# EAGLE board PCB (EAGLE 9.7.0), part 1 of 2
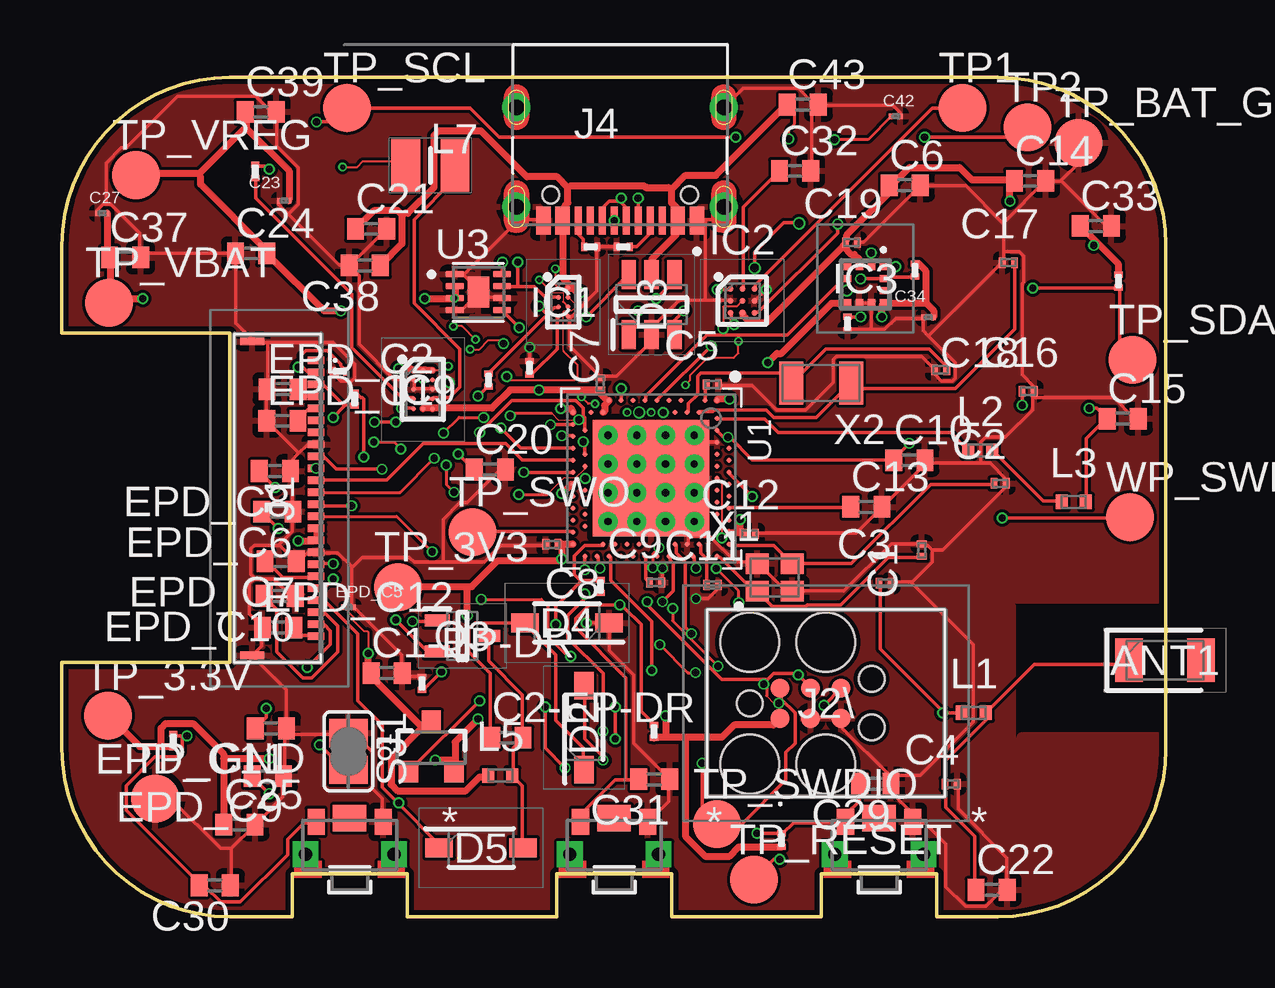
[diagram p0: board, top side]
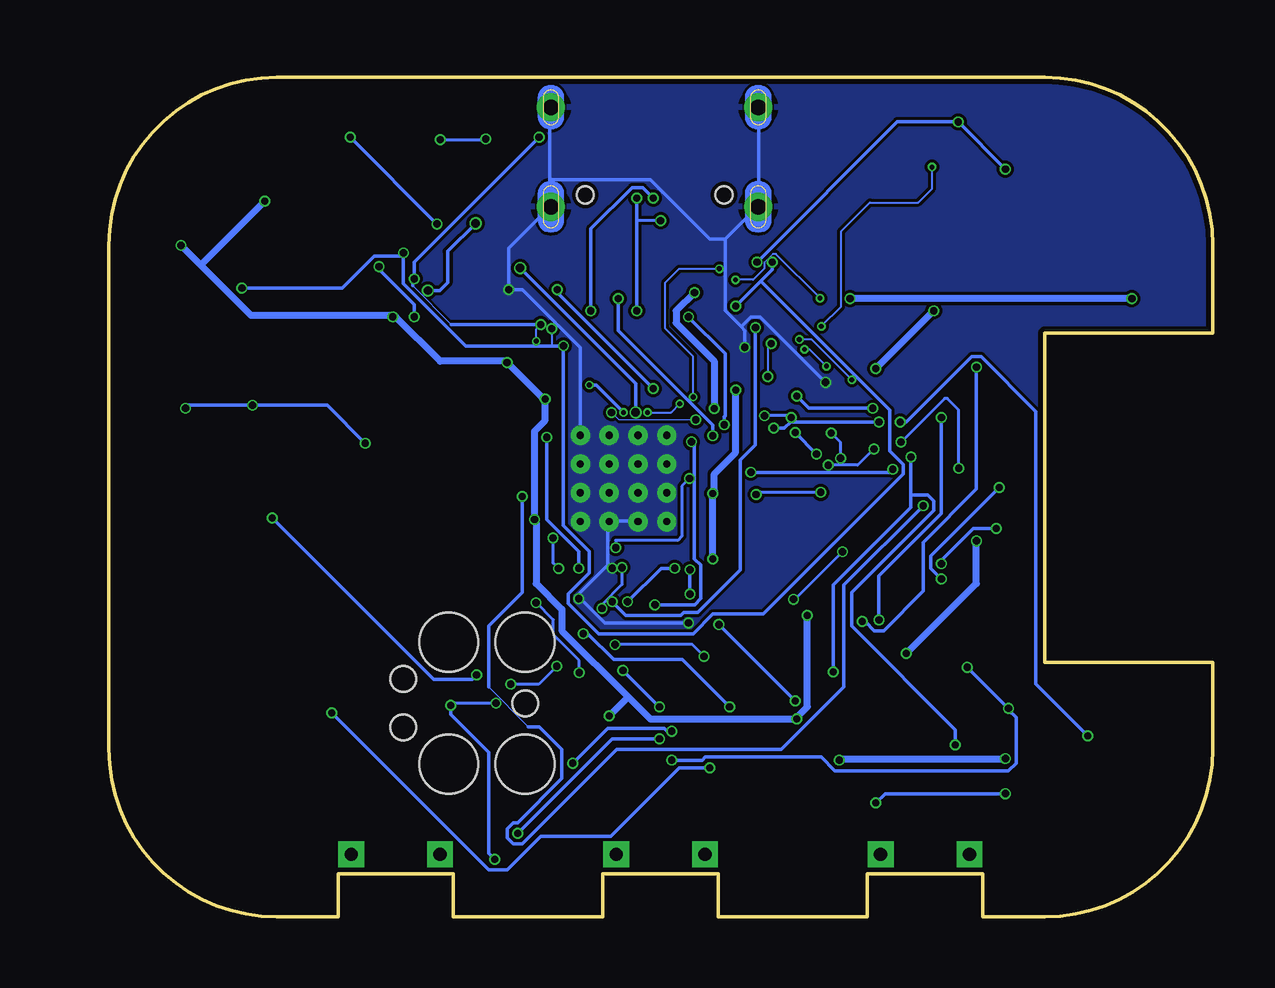
[diagram p1: board, bottom side, seen from below]

Size 46 x 35 mm. Coordinates in mm from the lower left corner, seen from the top.
Outline: 39,0 36.45,0 36.45,1.8 31.65,1.8 31.65,0 25.41,0 25.41,1.8 20.61,1.8 20.61,0 14.4,0 14.4,1.8 9.59,1.8 9.59,0 7,0 arc-90 0,7 0,10.6 7,10.6 7,24.33 0,24.33 0,28 arc-90 7,35 39,35 arc-90 46,28 46,7 arc-90 39,0
Copper layers (1*16): Top 0.035mm / dielectric 1.6mm / Bottom 0.035mm
Design rules "jlcpcb-2layers.dru *": minimum track width 5mil, minimum drill 0.3mm, track to track 5mil, track to pad 5mil, pad to pad 5mil, via to via 5mil, smd to smd 5mil, copper to edge 0.2mm, drill to drill 6mil, minimum pad ring 10mil, minimum via ring 3mil, stop-mask expansion 4mil, vias tented up to drill 0mil, thermal gap 10mil
Net classes: 1 Power: width 0.3 mm; 2 Not Power: width 0.15 mm

## Footprints (pad centres in the part's own frame; a part is rotated, then mirrored left to right if it is on the bottom)
2450AT18B100E_ANTC3216X140N = smd 1.15 x 1.8: 1 -1.5,0; 2 1.5,0
NORDIC_NRF_3_RESC0201_L = smd 0.28 x 0.43: 1 -0.255,0; 2 0.255,0
ESP32_C6_LIBRARY_1_ESP32_WROVER_EAGLE-LTSPICE_C0402 = smd 0.7 x 0.9: 1 -0.65,0; 2 0.65,0
GRM011R60J152KE01L_2_CAPC0201X13N = smd 0.22 x 0.23: 1 -0.185,0; 2 0.185,0
ESP32_C6_LIBRARY_5_SOD3716X135N = smd 1.15 x 0.8: 1 -1.75,0; 2 1.75,0
ESP32_C6_LIBRARY_3_SOT95P280X145-6N = smd 1.2 x 0.6: 1 -1.25,0.95; 2 -1.25,0; 3 -1.25,-0.95; 4 1.25,-0.95; 5 1.25,0; 6 1.25,0.95
BQ25180YBGR_BGA8C40P2X4_100X155X50 = smd 0.2 x 0.2: A1 -0.2,0.6; A2 0.2,0.6; B1 -0.2,0.2; B2 0.2,0.2; C1 -0.2,-0.2; C2 0.2,-0.2; D1 -0.2,-0.6; D2 0.2,-0.6
DRV2605YZFR_BGA9C50P3X3_144X144X62 = smd 0.25 x 0.25: A1 -0.5,0.5; A2 0,0.5; A3 0.5,0.5; B1 -0.5,0; B2 0,0; B3 0.5,0; C1 -0.5,-0.5; C2 0,-0.5; C3 0.5,-0.5
BMA423_BMA423 = smd 0.3 x 0.35: 1 -0.75,-0.775; 2 -0.25,-0.775; 3 0.25,-0.775; 4 0.75,-0.775; 7 0.75,0.775; 8 0.25,0.775; 9 -0.25,0.775; 10 -0.75,0.775 | smd 0.35 x 0.3: 5 0.775,-0.25; 6 0.775,0.25; 11 -0.775,0.25; 12 -0.775,-0.25
RT6160AWSC_BGA15C40P3X5_140X230X60 = smd 0.216 x 0.216: A1 -0.4,0.8; A2 0,0.8; A3 0.4,0.8; B1 -0.4,0.4; B2 0,0.4; B3 0.4,0.4; C1 -0.4,0; C2 0,0; C3 0.4,0; D1 -0.4,-0.4; D2 0,-0.4; D3 0.4,-0.4; E1 -0.4,-0.8; E2 0,-0.8; E3 0.4,-0.8
503480-2400_5034802400 = smd 0.3 x 0.7: 1 -5.75,1.525; 2 -5.25,1.525; 3 -4.75,1.525; 4 -4.25,1.525; 5 -3.75,1.525; 6 -3.25,1.525; 7 -2.75,1.525; 8 -2.25,1.525; 9 -1.75,1.525; 10 -1.25,1.525; 11 -0.75,1.525; 12 -0.25,1.525; 13 0.25,1.525; 14 0.75,1.525; 15 1.25,1.525; 16 1.75,1.525; 17 2.25,1.525; 18 2.75,1.525; 19 3.25,1.525; 20 3.75,1.525; 21 4.25,1.525; 22 4.75,1.525; 23 5.25,1.525; 24 5.75,1.525 | smd 0.3 x 1: MP1 -6.54,-1.125; MP2 6.54,-1.125
TC2030-IDC_TC2030IDC = smd 0.783 x 0.783: 1 -0.953,-0.635; 2 -0.953,0.635; 3 0.317,-0.635; 4 0.317,0.635; 5 1.588,-0.635; 6 1.588,0.635 | hole 2.451: -2.223,-2.54; -2.223,2.54; 0.952,-2.54; 0.952,2.54 | hole 1.067: -2.223,0; 2.857,-1.016; 2.857,1.016
KH-TYPE-C-16P_KINGHELM_KH-TYPE-C-16P = smd 0.6 x 1.15: A1_B12 -3.2,4.725; A4_B9 -2.4,4.725; A9_B4 2.4,4.725; A12_B1 3.2,4.725 | smd 0.3 x 1.15: A5 -1.25,4.725; A6 -0.25,4.725; A7 0.25,4.725; A8 1.25,4.725; B5 1.75,4.725; B6 0.75,4.725; B7 -0.75,4.725; B8 -1.75,4.725 | drill 0.65 pad 1.05: SH1 -4.32,0; SH2 4.32,0; SH3 -4.32,4.15; SH4 4.32,4.15 | hole 0.7: -2.89,3.65; 2.89,3.65
NORDIC_NRF_2_RESC0402_L = smd 0.5 x 0.6: 1 -0.5,0; 2 0.5,0
MLP2016SR47MT0S1_INDC2016X100N = smd 1.2 x 2.2: 1 -1.028,0; 2 1.028,0
ESP32_C6_LIBRARY_4_ESP32_C6_LIBRARY_4_ESP32_C6_LIBRARY_4_ESP32_C6_LIBRARY_4_ESP32_WROVER_SPARKFUN-DISCRETESEMI_SOT23-3 = smd 0.8 x 0.9: 1 -0.95,-1; 2 0.95,-1; 3 0,1.1
ESP32_C6_LIBRARY_6_SOT65P210X110-3N = smd 1.05 x 0.5: 1 -1.05,0.65; 2 -1.05,-0.65; 3 1.05,0
CPF0201D7K68C1_0201 = smd 0.35 x 0.25: 1 0,0.275; 2 0,-0.275
ESP32_C6_LIBRARY_7_JUMPER_SJ = smd 1.168 x 1.6: 1 -0.762,0; 2 0.762,0
2025-10-22_07-23-44_LIBRARY_SW_EVP-AKE31A_PAN = smd 0.711 x 1.092: 1 -1.4,-0.972; 2 1.4,-0.972 | drill 0.559 pad 0.914 square: 3 -1.848,0.381; 4 1.848,0.381 | smd 1.397 x 1.092: 5 0,-1.124
HECTOR_WATCH_1_TP20R = smd 2 x 2: TP 0,0
NORDIC_NRF_4_AQFN50P700X700X85_HS-74N = smd 4.85 x 4.85: P$74 0,0 | drill 0.3 pad 0.6: P$75 -1.8,1.8; P$76 -0.6,1.8; P$77 0.6,1.8; P$78 1.8,1.8; P$79 -1.8,0.6; P$80 -0.6,0.6; P$81 0.6,0.6; P$82 1.8,0.6; P$83 -1.8,-0.6; P$84 -0.6,-0.6; P$85 0.6,-0.6; P$86 1.8,-0.6; P$87 -1.8,-1.8; P$88 -0.6,-1.8; P$89 0.6,-1.8; P$90 1.8,-1.8 | smd 0.2 x 0.2: P$A8 -1.25,3.25; P$A10 -0.75,3.25; P$A12 -0.25,3.25; P$A14 0.25,3.25; P$A16 0.75,3.25; P$A18 1.25,3.25; P$A20 1.75,3.25; P$A22 2.25,3.25; P$A23 2.75,3.25; P$AA24 3.25,-2.25; P$AB2 -2.75,-2.5; P$AC5 -2,-2.75; P$AC9 -1,-2.75; P$AC11 -0.5,-2.75; P$AC13 0,-2.75; P$AC15 0.5,-2.75; P$AC17 1,-2.75; P$AC19 1.5,-2.75; P$AC21 2,-2.75; P$AC24 3.25,-2.75; P$AD2 -2.75,-3.25; P$AD4 -2.25,-3.25; P$AD6 -1.75,-3.25; P$AD8 -1.25,-3.25; P$AD10 -0.75,-3.25; P$AD12 -0.25,-3.25; P$AD14 0.25,-3.25; P$AD16 0.75,-3.25; P$AD18 1.25,-3.25; P$AD20 1.75,-3.25; P$AD22 2.25,-3.25; P$AD23 2.75,-3.25; P$B1 -3.25,2.75; P$B3 -2.5,2.75; P$B5 -2,2.75; P$B7 -1.5,2.75; P$B9 -1,2.75; P$B11 -0.5,2.75; P$B13 0,2.75; P$B15 0.5,2.75; P$B17 1,2.75; P$B19 1.5,2.75; P$B24 3.25,2.75; P$C1 -3.25,2.25; P$D2 -2.75,2; P$D23 2.75,2; P$E24 3.25,1.75; P$F2 -2.75,1.5; P$F23 2.75,1.5; P$G1 -3.25,1.25; P$H2 -2.75,1; P$H23 2.75,1; P$J1 -3.25,0.75; P$J24 3.25,0.75; P$K2 -2.75,0.5; P$L1 -3.25,0.25; P$L24 3.25,0.25; P$M2 -2.75,0; P$N1 -3.25,-0.25; P$N24 3.25,-0.25; P$P2 -2.75,-0.5; P$P23 2.75,-0.5; P$R1 -3.25,-0.75; P$R24 3.25,-0.75; P$T2 -2.75,-1; P$T23 2.75,-1; P$U1 -3.25,-1.25; P$U24 3.25,-1.25; P$V23 2.75,-1.5; P$W1 -3.25,-1.75; P$W24 3.25,-1.75; P$Y2 -2.75,-2; P$Y23 2.75,-2
ESP32_C6_LIBRARY_SON50P200X200X80-9N = smd 0.76 x 0.27: 1 -0.985,0.75; 2 -0.985,0.25; 3 -0.985,-0.25; 4 -0.985,-0.75; 5 0.985,-0.75; 6 0.985,-0.25; 7 0.985,0.25; 8 0.985,0.75 | smd 0.9 x 1.3: 9 0,0
NORDIC_NRF_BT-XTAL_2016_N = smd 0.95 x 0.85: 1 -0.725,-0.575; 2 0.725,-0.575; 3 0.725,0.575; 4 -0.725,0.575
NORDIC_NRF_1_XTAL_3215_N = smd 1 x 1.8: 1 -1.25,0; 2 1.25,0

## Placement (x,y rotation side)
ANT1  2450AT18B100E  [2450AT18B100E_ANTC3216X140N]  45.96,10.7 0 top
C1  12pF  [NORDIC_NRF_3_RESC0201_L]  35.83,15.29 90 top
C1-EP-DR  10uF  [ESP32_C6_LIBRARY_1_ESP32_WROVER_EAGLE-LTSPICE_C0402]  13.54,10.17 0 top
C2  12pF  [NORDIC_NRF_3_RESC0201_L]  39.09,18.07 0 top
C2-EP-DR  4.7uF  [ESP32_C6_LIBRARY_1_ESP32_WROVER_EAGLE-LTSPICE_C0402]  18.56,7.47 0 top
C3  1pF  [NORDIC_NRF_3_RESC0201_L]  34.3,13.91 0 top
C4  1pF  [NORDIC_NRF_3_RESC0201_L]  37.05,5.54 0 top
C5  100nF  [NORDIC_NRF_3_RESC0201_L]  27.1,22.19 0 top
C6  4.7uF  [ESP32_C6_LIBRARY_1_ESP32_WROVER_EAGLE-LTSPICE_C0402]  35.12,30.5 0 top
C7  100nF  [NORDIC_NRF_3_RESC0201_L]  22.43,22.22 90 top
C8  100nF  [NORDIC_NRF_3_RESC0201_L]  20.41,15.53 180 top
C9  820pF  [NORDIC_NRF_3_RESC0201_L]  24.74,13.94 0 top
C10  N.C.  [ESP32_C6_LIBRARY_1_ESP32_WROVER_EAGLE-LTSPICE_C0402]  35.31,19.04 0 top
C11  100pF  [NORDIC_NRF_3_RESC0201_L]  27.11,13.84 0 top
C12  100nF  [NORDIC_NRF_3_RESC0201_L]  28.64,15.97 0 top
C13  N.C.  [ESP32_C6_LIBRARY_1_ESP32_WROVER_EAGLE-LTSPICE_C0402]  33.52,17.09 0 top
C14  4.7uF  [ESP32_C6_LIBRARY_1_ESP32_WROVER_EAGLE-LTSPICE_C0402]  40.34,30.68 0 top
C15  1.0uF  [ESP32_C6_LIBRARY_1_ESP32_WROVER_EAGLE-LTSPICE_C0402]  44.2,20.77 0 top
C16  47nF  [NORDIC_NRF_3_RESC0201_L]  40.26,21.91 0 top
C17  12pF  [NORDIC_NRF_3_RESC0201_L]  39.44,27.27 0 top
C18  12pF  [NORDIC_NRF_3_RESC0201_L]  36.61,22.81 0 top
C19  100nF  [NORDIC_NRF_3_RESC0201_L]  32.9,28.11 0 top
C20  4.7uF  [ESP32_C6_LIBRARY_1_ESP32_WROVER_EAGLE-LTSPICE_C0402]  17.83,18.65 0 top
C21  4.7uF  [ESP32_C6_LIBRARY_1_ESP32_WROVER_EAGLE-LTSPICE_C0402]  12.88,28.68 0 top
C22  N.C.  [ESP32_C6_LIBRARY_1_ESP32_WROVER_EAGLE-LTSPICE_C0402]  38.74,1.13 0 top
C23  0.1uF  [GRM011R60J152KE01L_2_CAPC0201X13N]  9.26,29.85 0 top
C24  10uF  [ESP32_C6_LIBRARY_1_ESP32_WROVER_EAGLE-LTSPICE_C0402]  7.88,27.66 0 top
C25  22uF  [ESP32_C6_LIBRARY_1_ESP32_WROVER_EAGLE-LTSPICE_C0402]  7.4,3.85 0 top
C27  0.1uF  [GRM011R60J152KE01L_2_CAPC0201X13N]  1.68,29.33 0 top
C29  1uF  [ESP32_C6_LIBRARY_1_ESP32_WROVER_EAGLE-LTSPICE_C0402]  33.89,5.54 180 top
C30  1uF  [ESP32_C6_LIBRARY_1_ESP32_WROVER_EAGLE-LTSPICE_C0402]  6.37,1.32 180 top
C31  1uF  [ESP32_C6_LIBRARY_1_ESP32_WROVER_EAGLE-LTSPICE_C0402]  24.68,5.74 180 top
C32  1uF  [ESP32_C6_LIBRARY_1_ESP32_WROVER_EAGLE-LTSPICE_C0402]  30.55,31.1 0 top
C33  22uF  [ESP32_C6_LIBRARY_1_ESP32_WROVER_EAGLE-LTSPICE_C0402]  43.08,28.8 0 top
C34  0.1uF  [GRM011R60J152KE01L_2_CAPC0201X13N]  36.11,24.99 0 top
C37  1uF  [ESP32_C6_LIBRARY_1_ESP32_WROVER_EAGLE-LTSPICE_C0402]  2.63,27.49 0 top
C38  1uF  [ESP32_C6_LIBRARY_1_ESP32_WROVER_EAGLE-LTSPICE_C0402]  12.62,27.15 180 top
C39  10uF  [ESP32_C6_LIBRARY_1_ESP32_WROVER_EAGLE-LTSPICE_C0402]  8.28,33.56 0 top
C42  0.1uF  [GRM011R60J152KE01L_2_CAPC0201X13N]  34.75,33.37 0 top
C43  4.7uF  [ESP32_C6_LIBRARY_1_ESP32_WROVER_EAGLE-LTSPICE_C0402]  30.87,33.86 0 top
D2  MBR0530  [ESP32_C6_LIBRARY_5_SOD3716X135N]  21.75,7.89 90 top
D3  ESP32_C6_LIBRARY_3_USBLC6-2SC6Y  [ESP32_C6_LIBRARY_3_SOT95P280X145-6N]  24.57,25.52 90 top
D4  MBR0530  [ESP32_C6_LIBRARY_5_SOD3716X135N]  21.05,12.25 180 top
D5  MBR0530  [ESP32_C6_LIBRARY_5_SOD3716X135N]  17.47,2.88 0 top
EPD_C1  1uF/50V  [ESP32_C6_LIBRARY_1_ESP32_WROVER_EAGLE-LTSPICE_C0402]  9.19,20.68 0 top
EPD_C2  1uF/50V  [ESP32_C6_LIBRARY_1_ESP32_WROVER_EAGLE-LTSPICE_C0402]  9.2,22 0 top
EPD_C5  0.1uF/50V  [GRM011R60J152KE01L_2_CAPC0201X13N]  11.94,12.9 0 top
EPD_C6  1uF/5OV  [ESP32_C6_LIBRARY_1_ESP32_WROVER_EAGLE-LTSPICE_C0402]  8.98,16.89 180 top
EPD_C7  1uF/50V  [ESP32_C6_LIBRARY_1_ESP32_WROVER_EAGLE-LTSPICE_C0402]  9.11,14.82 180 top
EPD_C8  1uF/50V  [ESP32_C6_LIBRARY_1_ESP32_WROVER_EAGLE-LTSPICE_C0402]  8.88,18.59 180 top
EPD_C9  1uF/50V  [ESP32_C6_LIBRARY_1_ESP32_WROVER_EAGLE-LTSPICE_C0402]  8.58,5.86 180 top
EPD_C10  1uF/50V  [ESP32_C6_LIBRARY_1_ESP32_WROVER_EAGLE-LTSPICE_C0402]  9.08,13.38 180 top
EPD_C11  1uF/50V  [ESP32_C6_LIBRARY_1_ESP32_WROVER_EAGLE-LTSPICE_C0402]  8.71,7.86 180 top
EPD_C12  1uF/50V  [ESP32_C6_LIBRARY_1_ESP32_WROVER_EAGLE-LTSPICE_C0402]  9.01,12.06 0 top
IC1  BQ25180YBGR_BQ25180YBGR  [BQ25180YBGR_BGA8C40P2X4_100X155X50]  20.89,25.63 0 top
IC2  DRV2605YZFR_DRV2605YZFR  [DRV2605YZFR_BGA9C50P3X3_144X144X62]  28.35,25.69 0 top
IC3  BMA423  [BMA423_BMA423]  33.48,26.36 180 top
IC9  RT6160AWSC  [RT6160AWSC_BGA15C40P3X5_140X230X60]  15.04,21.99 0 top
J1  503480-2400_503480-2400  [503480-2400_5034802400]  9.06,17.45 270 top
J2\  TC2030-IDC  [TC2030-IDC_TC2030IDC]  30.88,8.91 0 top
J4  KH-TYPE-C-16P  [KH-TYPE-C-16P_KINGHELM_KH-TYPE-C-16P]  23.26,33.75 180 top
L1  3.9nH  [NORDIC_NRF_2_RESC0402_L]  38,8.51 0 top
L2  10uH  [NORDIC_NRF_2_RESC0402_L]  38.27,19.44 0 top
L3  15nH  [NORDIC_NRF_2_RESC0402_L]  42.16,17.3 0 top
L5  68uH  [NORDIC_NRF_2_RESC0402_L]  18.27,5.89 0 top
L7  FTC252012SR47MBCA  [MLP2016SR47MT0S1_INDC2016X100N]  15.35,31.33 0 top
Q1  20V/4.2A/52mΩ/1.4W  [ESP32_C6_LIBRARY_4_ESP32_C6_LIBRARY_4_ESP32_C6_LIBRARY_4_ESP32_C6_LIBRARY_4_ESP32_WROVER_SPARKFUN-DISCRETESEMI_SOT23-3]  15.39,7.05 0 top
Q3  SI1308EDL-T1-GE3  [ESP32_C6_LIBRARY_6_SOT65P210X110-3N]  16.69,11.71 0 top
R1_EP_DR  0.47  [CPF0201D7K68C1_0201]  12.2,21.59 0 top
R1_USB  5K1  [CPF0201D7K68C1_0201]  23.39,27.93 90 top
R2  0  [CPF0201D7K68C1_0201]  17.78,22.38 180 top
R2_EP_DR  10K  [CPF0201D7K68C1_0201]  11.57,22.75 90 top
R2_USB  5K1  [CPF0201D7K68C1_0201]  22.03,27.93 90 top
R3  0  [CPF0201D7K68C1_0201]  32.74,24.74 0 top
R4  0  [CPF0201D7K68C1_0201]  8.06,31.08 180 top
R5  10K  [CPF0201D7K68C1_0201]  4.64,7.35 0 top
R7  10K  [CPF0201D7K68C1_0201]  29.98,3.2 0 top
R8  10K  [CPF0201D7K68C1_0201]  24.67,7.74 0 top
R9  10K  [CPF0201D7K68C1_0201]  19.49,22.89 0 top
R17  3K3  [CPF0201D7K68C1_0201]  35.54,26.96 0 top
R18  3K3  [CPF0201D7K68C1_0201]  44.02,26.51 0 top
R_PWR_EPD  10K  [CPF0201D7K68C1_0201]  22.44,13.77 0 top
R_TYPE_SEL  2.2  [CPF0201D7K68C1_0201]  15.01,9.73 0 top
SJ1  SJ  [ESP32_C6_LIBRARY_7_JUMPER_SJ]  11.94,6.9 270 top
SW_DN  2025-10-22_07-23-44_LIBRARY_EVP-AKE31ASW_EVP-AKE31A_PAN  [2025-10-22_07-23-44_LIBRARY_SW_EVP-AKE31A_PAN]  34.05,2.99 180 top
SW_ENT  2025-10-22_07-23-44_LIBRARY_EVP-AKE31ASW_EVP-AKE31A_PAN  [2025-10-22_07-23-44_LIBRARY_SW_EVP-AKE31A_PAN]  23.01,2.99 180 top
SW_UP  2025-10-22_07-23-44_LIBRARY_EVP-AKE31ASW_EVP-AKE31A_PAN  [2025-10-22_07-23-44_LIBRARY_SW_EVP-AKE31A_PAN]  11.99,2.99 180 top
TP1  HECTOR_WATCH_1_TPTP20R  [HECTOR_WATCH_1_TP20R]  37.52,33.72 0 top
TP2  HECTOR_WATCH_1_TPTP20R  [HECTOR_WATCH_1_TP20R]  40.24,32.91 0 top
TP_3.3V  HECTOR_WATCH_1_TPTP20R  [HECTOR_WATCH_1_TP20R]  1.92,8.38 0 top
TP_3V3  HECTOR_WATCH_1_TPTP20R  [HECTOR_WATCH_1_TP20R]  14,13.75 0 top
TP_BAT_GND  HECTOR_WATCH_1_TPTP20R  [HECTOR_WATCH_1_TP20R]  42.36,32.27 0 top
TP_GND  HECTOR_WATCH_1_TPTP20R  [HECTOR_WATCH_1_TP20R]  3.89,4.94 0 top
TP_RESET  HECTOR_WATCH_1_TPTP20R  [HECTOR_WATCH_1_TP20R]  28.83,1.55 0 top
TP_SCL  HECTOR_WATCH_1_TPTP20R  [HECTOR_WATCH_1_TP20R]  11.88,33.72 0 top
TP_SDA  HECTOR_WATCH_1_TPTP20R  [HECTOR_WATCH_1_TP20R]  44.62,23.22 0 top
TP_SWDIO  HECTOR_WATCH_1_TPTP20R  [HECTOR_WATCH_1_TP20R]  27.3,3.87 0 top
TP_SWO  HECTOR_WATCH_1_TPTP20R  [HECTOR_WATCH_1_TP20R]  17.11,16.04 0 top
TP_VBAT  HECTOR_WATCH_1_TPTP20R  [HECTOR_WATCH_1_TP20R]  1.96,25.61 0 top
TP_VREG  HECTOR_WATCH_1_TPTP20R  [HECTOR_WATCH_1_TP20R]  3.09,30.92 0 top
U1  NRF52840_QF  [NORDIC_NRF_4_AQFN50P700X700X85_HS-74N]  24.55,18.28 270 top
U3  ESP32_C6_LIBRARY_MAX17048G+T10  [ESP32_C6_LIBRARY_SON50P200X200X80-9N]  17.35,26.04 0 top
WP_SWDCLK  HECTOR_WATCH_1_TPTP20R  [HECTOR_WATCH_1_TP20R]  44.5,16.66 0 top
X1  32MHz  [NORDIC_NRF_BT-XTAL_2016_N]  29.7,14.15 0 top
X2  32.768kHz  [NORDIC_NRF_1_XTAL_3215_N]  31.63,22.26 180 top

## Library data of the parts
ANT1 = InkTime_v5; ARROW_PART_NUMBER: 2450AT18B100E; ARROW_PRICE-STOCK: https://www.arrow.com/en/products/2450at18b100e/johanson-dielectrics?utm_currency=USD&region=nac; DESCRIPTION: Antennas 2.45GHz ANTENNA; HEIGHT: 1.4mm; MANUFACTURER_NAME: JOHANSON TECHNOLOGY; MANUFACTURER_PART_NUMBER: 2450AT18B100E; MOUSER_PART_NUMBER: 609-2450AT18B100E; MOUSER_PRICE-STOCK: https://www.mouser.co.uk/ProductDetail/Johanson-Technology/2450AT18B100E?qs=yCnrNFeXz%252Bh5MFsFIXGZGA%3D%3D; SPICEPREFIX: B
C1-C5 C7-C9 C11 C12 C16-C19 L1-L3 L5 R1_EP_DR R1_USB R2 R2_EP_DR R2_USB R3-R5 R7-R9 R17 R18 R_PWR_EPD R_TYPE_SEL SJ1 TP1 TP2 TP_3.3V TP_3V3 TP_BAT_GND TP_GND TP_RESET TP_SCL TP_SDA TP_SWDIO TP_SWO TP_VBAT TP_VREG U1 WP_SWDCLK X1 X2 = InkTime_v5
C1-EP-DR C2-EP-DR C6 C10 C13-C15 C20-C22 C24 C25 C29-C33 C37-C39 C43 EPD_C1 EPD_C2 EPD_C6-EPD_C12 = InkTime_v5; SPICEMODEL: NONE; SPICEPREFIX: C
C23 C27 C34 C42 EPD_C5 = InkTime_v5; AVAILABILITY: In Stock; CHECK_PRICES: https://www.snapeda.com/parts/GRM011R60J152KE01L/Murata/view-part/?ref=eda; DESCRIPTION: SMD Capacitor X5R(EIA) with Capacitance: 1500pF Tol. 10%. Rated Voltage: 6.3Vdc; MF: Murata; MP: GRM011R60J152KE01L; PACKAGE: 0201 Murata; PRICE: None; SNAPEDA_LINK: https://www.snapeda.com/parts/GRM011R60J152KE01L/Murata/view-part/?ref=snap
D2 D4 D5 = InkTime_v5; AVAILABILITY: In Stock; CHECK_PRICES: https://www.snapeda.com/parts/MBR0530/Onsemi/view-part/?ref=eda; DESCRIPTION: Diode Schottky 30 V 500mA Surface Mount SOD-123; MF: ON Semiconductor; MP: MBR0530; PACKAGE: SOD-123-2 ON Semiconductor; PRICE: None; PURCHASE-URL: https://www.snapeda.com/api/url_track_click_mouser/?unipart_id=179458&manufacturer=ON Semiconductor&part_name=MBR0530&search_term=None; SNAPEDA_LINK: https://www.snapeda.com/parts/MBR0530/Onsemi/view-part/?ref=snap
D3 = InkTime_v5; AVAILABILITY: In Stock; CHECK_PRICES: https://www.snapeda.com/parts/USBLC6-2SC6Y/STMicroelectronics/view-part/?ref=eda; DESCRIPTION: 17V Clamp 5A (8/20µs) Ipp Tvs Diode Surface Mount SOT-23-6; MF: STMicroelectronics; MP: USBLC6-2SC6Y; PACKAGE: SOT-23-6 STMicroelectronics; PRICE: None; SNAPEDA_LINK: https://www.snapeda.com/parts/USBLC6-2SC6Y/STMicroelectronics/view-part/?ref=snap
IC1 = InkTime_v5; ARROW_PART_NUMBER: BQ25180YBGR; ARROW_PRICE-STOCK: https://www.arrow.com/en/products/bq25180ybgr/texas-instruments?utm_currency=USD&region=nac; DESCRIPTION: Charger IC Lithium Ion/Polymer, Lithium Iron Phosphate 8-DSBGA (1.6x1.1); HEIGHT: 0.5mm; MANUFACTURER_NAME: Texas Instruments; MANUFACTURER_PART_NUMBER: BQ25180YBGR; MOUSER_PART_NUMBER: 595-BQ25180YBGR; MOUSER_PRICE-STOCK: https://www.mouser.co.uk/ProductDetail/Texas-Instruments/BQ25180YBGR?qs=doiCPypUmgEWjAK%252BJAX6Tw%3D%3D
IC2 = InkTime_v5; ARROW_PART_NUMBER: DRV2605YZFR; ARROW_PRICE-STOCK: https://www.arrow.com/en/products/drv2605yzfr/texas-instruments?region=nac; DESCRIPTION: Haptic Driver for ERM/LRA with Built-In Library and Smart Loop Architecture; HEIGHT: 0.625mm; MANUFACTURER_NAME: Texas Instruments; MANUFACTURER_PART_NUMBER: DRV2605YZFR
IC3 = InkTime_v5; ARROW_PART_NUMBER: BMA423; ARROW_PRICE-STOCK: https://www.arrow.com/en/products/bma423/bosch; DESCRIPTION: Accelerometers Triaxial low-g 12bit Acceleration Sensor; HEIGHT: 1mm; MANUFACTURER_NAME: BOSCH; MANUFACTURER_PART_NUMBER: BMA423; MOUSER_PART_NUMBER: 262-BMA423; MOUSER_PRICE-STOCK: https://www.mouser.co.uk/ProductDetail/Bosch-Sensortec/BMA423?qs=HXFqYaX1Q2xC%252BSgeGoX3mg%3D%3D
IC9 = InkTime_v5; DESCRIPTION: Buck-Boost Regulator Positive Output Step-Up/Step-Down I2C DC-DC Controller IC 15-WL-CSP (BSC) (1.4x2.3); HEIGHT: 0.6mm; MANUFACTURER_NAME: RICHTEK; MANUFACTURER_PART_NUMBER: RT6160AWSC; MOUSER_PART_NUMBER: 835-RT6160AWSC; MOUSER_PRICE-STOCK: https://www.mouser.co.uk/ProductDetail/Richtek/RT6160AWSC?qs=amGC7iS6iy%2FLd9PSoixZXQ%3D%3D
J1 = InkTime_v5; DESCRIPTION: FFC & FPC Connectors 0.5mm FPC RA SMT Dual Contact 24Ckt; HEIGHT: 1.87mm; MANUFACTURER_NAME: Molex; MANUFACTURER_PART_NUMBER: 503480-2400; MOUSER_PART_NUMBER: 538-503480-2400; MOUSER_PRICE-STOCK: https://www.mouser.co.uk/ProductDetail/Molex/503480-2400?qs=OAhjpuo3Vu7efIoxFh9AOw%3D%3D
J2\ = InkTime_v5; DESCRIPTION: CABLE ADAPTER 6 POS; HEIGHT: 19mm; MANUFACTURER_NAME: Tag Connect; MANUFACTURER_PART_NUMBER: TC2030-IDC
J4 = InkTime_v5; AVAILABILITY: Not in stock; CHECK_PRICES: https://www.snapeda.com/parts/KH-TYPE-C-16P/Kinghelm/view-part/?ref=eda; MF: kinghelm; MP: KH-TYPE-C-16P; PACKAGE: None; PRICE: None; SNAPEDA_LINK: https://www.snapeda.com/parts/KH-TYPE-C-16P/Kinghelm/view-part/?ref=snap
L7 = InkTime_v5; DESCRIPTION: SMD / SMT Inductors (Coils), L=0.47?H, L x W x T :; HEIGHT: 1mm; JLCPCB: https://jlcpcb.com/partdetail/6763488-FTC252012SR47MBCA/C5832368; MANUFACTURER_NAME: TDK; MANUFACTURER_PART_NUMBER: FTC252012SR47MBCA
Q1 = InkTime_v5; PROD_ID: TRAN-14388
Q3 = InkTime_v5; AVAILABILITY: In Stock; CHECK_PRICES: https://www.snapeda.com/parts/SI1308EDL-T1-GE3/Vishay+Siliconix/view-part/?ref=eda; DESCRIPTION: Si1308EDL-T1-GE3 N-channel MOSFET Transistor, 1.5 A, 30 V, 3-Pin SC-70 | Siliconix / Vishay SI1308EDL-T1-GE3; MF: Vishay Siliconix; MP: SI1308EDL-T1-GE3; PACKAGE: SOT-323 Vishay Semiconductor; PRICE: None; PURCHASE-URL: https://www.snapeda.com/api/url_track_click_mouser/?unipart_id=274603&manufacturer=Vishay Siliconix&part_name=SI1308EDL-T1-GE3&search_term=None; SNAPEDA_LINK: https://www.snapeda.com/parts/SI1308EDL-T1-GE3/Vishay+Siliconix/view-part/?ref=snap
SW_DN SW_ENT SW_UP = InkTime_v5; COPYRIGHT: Copyright (C) 2025 Ultra Librarian. All rights reserved.; DIGI-KEY_PART_NUMBER_1: P123437TR-ND; DIGI-KEY_PART_NUMBER_2: P123437CT-ND; DIGI-KEY_PART_NUMBER_3: P123437DKR-ND; MANUFACTURER_NAME: Panasonic; MANUFACTURER_PART_NUMBER: EVP-AKE31A
U3 = InkTime_v5; AVAILABILITY: In Stock; CHECK_PRICES: https://www.snapeda.com/parts/MAX17048G+T10/Analog+Devices/view-part/?ref=eda; DESCRIPTION: 3µA 1-Cell/2-Cell Fuel Gauge with ModelGauge; MF: Analog Devices; MP: MAX17048G+T10; PACKAGE: TDFN-8 Maxim; PRICE: None; PURCHASE-URL: https://www.snapeda.com/api/url_track_click_mouser/?unipart_id=329239&manufacturer=Analog Devices&part_name=MAX17048G+T10&search_term=None; SNAPEDA_LINK: https://www.snapeda.com/parts/MAX17048G+T10/Analog+Devices/view-part/?ref=snap

## Nets
3V3 [Power]: C6.1 C7.1 C8.1 C12.1 C14.1 C19.1 C25.1 C33.1 C34.2 IC2.C2 IC3.3 IC3.7 IC3.10 IC9.E2 IC9.E3 J2\.1 Q1.2 R5.2 R7.2 R8.2 R17.1 R18.1 TP_3.3V.TP TP_3V3.TP U1.P$A22 U1.P$AD14 U1.P$AD23 U1.P$B1 U1.P$W1 U1.P$Y2
ALERT [Not Power]: U1.P$J24 U3.5
D+ [Not Power]: D3.4 U1.P$AD6
D- [Not Power]: D3.6 U1.P$AD4
DEC1 [Not Power]: C5.1 U1.P$C1
DEC3 [Not Power]: C11.1 U1.P$D23
DEC4_6 [Not Power]: C10.1 C15.1 C16.1 L3.2 U1.P$B5 U1.P$E24
DN [Not Power]: D3.1 J4.A7 J4.B7
DP [Not Power]: D3.3 J4.A6 J4.B6
EPD_3V3 [Power]: C1-EP-DR.1 EPD_C5.1 J1.15 J1.16 L5.1 Q1.3
EPD_BUSY [Not Power]: J1.9 U1.P$AD12
EPD_CS [Not Power]: J1.12 U1.P$K2
EPD_DC [Not Power]: J1.11 U1.P$AD10
EPD_RST [Not Power]: J1.10 U1.P$AC11
GDR [Not Power]: J1.2 Q3.1 R2_EP_DR.2
GND [Not Power]: C1-EP-DR.2 C1.2 C2.2 C3.2 C4.2 C5.2 C6.2 C7.2 C8.2 C9.2 C10.2 C11.2 C12.2 C13.2 C14.2 C15.2 C16.2 C17.1 C18.1 C19.2 C20.2 C21.2 C22.2 C23.1 C24.1 C25.2 C27.1 C29.1 C30.1 C31.1 C32.2 C33.2 C34.1 C37.2 C38.2 C39.2 C42.2 C43.2 D3.2 D4.1 EPD_C1.1 EPD_C2.1 EPD_C5.2 EPD_C6.1 EPD_C7.1 EPD_C8.1 EPD_C9.1 EPD_C10.1 EPD_C11.1 EPD_C12.1 IC1.D2 IC2.B1 IC2.B3 IC3.8 IC3.9 IC9.B1 IC9.C1 IC9.C2 IC9.C3 J1.8 J1.17 J1.MP1 J1.MP2 J2\.3 J2\.5 J4.A1_B12 J4.A12_B1 J4.SH1 J4.SH2 J4.SH3 J4.SH4 R1_USB.1 R2_EP_DR.1 R2_USB.2 R3.2 R9.1 R_TYPE_SEL.1 SJ1.1 SW_DN.1 SW_ENT.1 SW_UP.1 TP_BAT_GND.TP TP_GND.TP U1.P$74 U1.P$75 U1.P$76 U1.P$77 U1.P$78 U1.P$79 U1.P$80 U1.P$81 U1.P$82 U1.P$83 U1.P$84 U1.P$85 U1.P$86 U1.P$87 U1.P$88 U1.P$89 U1.P$90 U1.P$B7 U1.P$F23 U3.1 U3.4 U3.6 U3.9 X1.2 X1.4
HAPTIC_EN [Not Power]: IC2.A1 U1.P$U1
IMU_INT1 [Not Power]: IC3.5 U1.P$N1
IMU_INT2 [Not Power]: IC3.6 U1.P$P2
LX1 [Not Power]: IC9.B2 L7.1
LX2 [Not Power]: IC9.D2 IC9.D3 L7.2
MOSI [Not Power]: J1.14 U1.P$B13
N$1 [Not Power]: J4.A5 R1_USB.2
N$2 [Not Power]: C2-EP-DR.2 D5.2 L5.2 Q3.3
N$3 [Not Power]: L2.2 L3.1
N$4 [Not Power]: IC3.1 R3.1
N$5 [Not Power]: C2.1 U1.P$A23 X1.3
N$6 [Not Power]: IC1.D1 R9.2
N$7 [Not Power]: L2.1 U1.P$B3
N$8 [Not Power]: IC9.E1 R2.1
N$9 [Not Power]: C1.1 U1.P$B24 X1.1
N$10 [Not Power]: IC9.D1 R4.1
N$11 [Not Power]: C13.1 U1.P$A18
N$12 [Not Power]: C3.1 L1.1 U1.P$H23
N$13 [Not Power]: C20.1 U1.P$AC5
N$14 [Not Power]: C2-EP-DR.1 D2.1 D4.2
N$15 [Not Power]: C32.1 IC2.A2
N$16 [Not Power]: C9.1 U1.P$N24
N$18 [Not Power]: R1_EP_DR.1 R_TYPE_SEL.2 SJ1.2
N$19 [Not Power]: R_PWR_EPD.2
N$20 [Not Power]: EPD_C2.2 J1.4
N$21 [Not Power]: EPD_C1.2 J1.5
N$23 [Not Power]: J4.B5 R2_USB.1
N$29 [Not Power]: EPD_C12.2 J1.24
N$31 [Not Power]: EPD_C10.2 J1.22
N$33 [Not Power]: EPD_C8.2 J1.20
N$34 [Not Power]: EPD_C7.2 J1.19
N$35 [Not Power]: EPD_C6.2 J1.18
OUT+ [Not Power]: IC2.A3 TP1.TP
OUT- [Not Power]: IC2.C3 TP2.TP
P0.00 [Not Power]: C17.2 U1.P$D2 X2.1
P0.01 [Not Power]: C18.2 U1.P$F2 X2.2
P0.04 [Not Power]: U1.P$J1
P0.09 [Not Power]: U1.P$L24
P0.13 [Not Power]: C30.2 R5.1 SW_UP.2 U1.P$AD8
P0.14 [Not Power]: C31.2 R8.1 SW_ENT.2 U1.P$AC9
P0.19 [Not Power]: U1.P$AC15
P0.20 [Not Power]: U1.P$AD16
P0.21 [Not Power]: U1.P$AC17
P0.22 [Not Power]: U1.P$AD18
P0.23 [Not Power]: U1.P$AC19
P0.24 [Not Power]: U1.P$AD20
P0.25 [Not Power]: U1.P$AC21
P0.26 [Not Power]: U1.P$G1
P0.27 [Not Power]: U1.P$H2
P0.28 [Not Power]: U1.P$B11
P0.29 [Not Power]: U1.P$A10
P0.30 [Not Power]: U1.P$B9
P0.31 [Not Power]: U1.P$A8
P1.01 [Not Power]: Q1.1 R_PWR_EPD.1 U1.P$Y23
P1.02 [Not Power]: C29.2 R7.1 SW_DN.2 U1.P$W24
P1.03 [Not Power]: U1.P$V23
P1.04 [Not Power]: U1.P$U24
P1.05 [Not Power]: U1.P$T23
P1.06 [Not Power]: U1.P$R24
P1.07 [Not Power]: U1.P$P23
P1.09 [Not Power]: U1.P$R1
P1.10 [Not Power]: U1.P$A20
P1.11 [Not Power]: U1.P$B19
P1.12 [Not Power]: U1.P$B17
P1.13 [Not Power]: U1.P$A16
P1.14 [Not Power]: U1.P$B15
P1.15 [Not Power]: U1.P$A14
PMIC_INT [Not Power]: IC1.A1 U1.P$T2
PREVGH [Not Power]: D5.1 EPD_C9.2 J1.21
PREVGL [Not Power]: D2.2 EPD_C11.2 J1.23
RESE [Not Power]: J1.3 Q3.2 R1_EP_DR.2
RESET [Not Power]: J2\.6 TP_RESET.TP U1.P$AC13
RF [Not Power]: ANT1.1 C4.1 C22.1 L1.2
SCK [Not Power]: J1.13 U1.P$A12
SCL [Not Power]: IC1.B1 IC2.C1 IC3.12 R4.2 R17.2 TP_SCL.TP U1.P$M2 U3.7
SDA [Not Power]: IC1.C1 IC2.B2 IC3.2 R2.2 R18.2 TP_SDA.TP U1.P$L1 U3.8
SWDCLK [Not Power]: J2\.4 U1.P$AA24 WP_SWDCLK.TP
SWDIO [Not Power]: J2\.2 TP_SWDIO.TP U1.P$AC24
SWO [Not Power]: TP_SWO.TP U1.P$AD22
VBAT [Power]: C27.2 C37.1 IC1.C2 TP_VBAT.TP U3.2 U3.3
VBUS [Power]: C21.1 C38.1 C42.1 C43.1 D3.5 IC1.A2 J4.A4_B9 J4.A9_B4 U1.P$AD2
VREG [Power]: C23.2 C24.2 C39.1 IC1.B2 IC9.A1 IC9.A2 IC9.A3 TP_VREG.TP